# Altium PCB Test (2).PcbDoc (part 3 of 4)
Units mm, origin at the board's own origin, x right, y up, seen from the top; angles counter-clockwise.
Board outline 152.4 x 101.6 mm, 2 copper layers (Top Layer, Bottom Layer); 1 components, 0 nets, 300 pads, 1 vias.
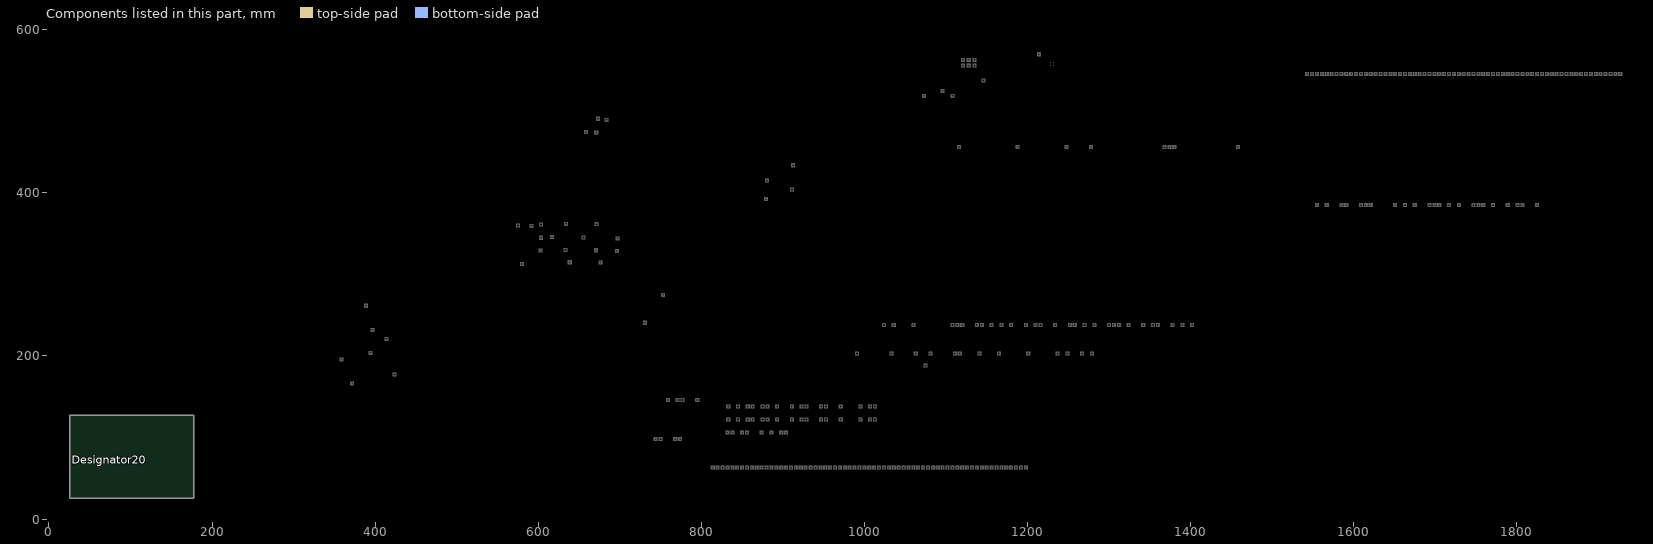
[diagram p3: the components of this part, seen from the top]

## Via types
v1: diameter 0.9, hole 0.4, Top Layer to Bottom Layer, 1 vias

## Nets (pads, with @x,y where several pads share a name; then routed paths per layer and width w, separated by ;. In a path a pad name is that pad's centre, name@x,y a point inside that pad or via, vN(x,y) a via of type N, cw(c..) or ccw(c..) an arc to the next point about the centre after c; other vN are vias at no path point) (continued)
copper on no net: (continued)
  Top Layer w0.2: 1010,188 ccw(c1009,188) 1010,188 ; 1010,188 ccw(c1009,188) 1010,188 ; 1013,188 1015,188 ; 1013,188 1015,188 ; 1013,188 1015,188 ; 1015,186 1015,188 ; 1015,186 1015,188 ; 1015,186 1015,188 ; 1015,188 1017,188 ; 1015,188 1015,190 ; 1015,188 1017,188 ; 1015,188 1015,190 ; 1015,188 1017,188 ; 1015,188 1015,190 ; 1016,188 ccw(c1015,188) 1016,188 ; 1016,188 ccw(c1015,188) 1016,188 ; 1016,188 ccw(c1015,188) 1016,188 ; 1019,188 1021,188 ; 1019,188 1021,188 ; 1019,188 1021,188 ; 1021,186 1021,188 ; 1021,186 1021,188 ; 1021,186 1021,188 ; 1021,188 1023,188 ; 1021,188 1021,190 ; 1021,188 1023,188 ; 1021,188 1021,190 ; 1021,188 1023,188 ; 1021,188 1021,190 ; 1022,188 ccw(c1021,188) 1022,188 ; 1022,188 ccw(c1021,188) 1022,188 ; 1022,188 ccw(c1021,188) 1022,188 ; 1022,238 1024,238 ; 1022,238 1024,238 ; 1022,238 1024,238 ; 1022,238 1024,238 ; 1024,236 1024,238 ; 1024,236 1024,238 ; 1024,236 1024,238 ; 1024,236 1024,238 ; 1024,238 1026,238 ; 1024,238 1024,240 ; 1024,238 1026,238 ; 1024,238 1024,240 ; 1024,238 1026,238 ; 1024,238 1024,240 ; 1024,238 1026,238 ; 1024,238 1024,240 ; 1025,188 1027,188 ; 1025,188 1027,188 ; 1025,188 1027,188 ; 1025,238 ccw(c1024,238) 1025,238 ; 1025,238 ccw(c1024,238) 1025,238 ; 1025,238 ccw(c1024,238) 1025,238 ; 1025,238 ccw(c1024,238) 1025,238 ; 1027,186 1027,188 ; 1027,186 1027,188 ; 1027,186 1027,188 ; 1027,188 1029,188 ; 1027,188 1027,190 ; 1027,188 1029,188 ; 1027,188 1027,190 ; 1027,188 1029,188 ; 1027,188 1027,190 ; 1028,188 ccw(c1027,188) 1028,188 ; 1028,188 ccw(c1027,188) 1028,188 ; 1028,188 ccw(c1027,188) 1028,188 ; 1031,188 1033,188 ; 1031,188 1033,188 ; 1031,188 1033,188 ; 1033,186 1033,188 ; 1033,186 1033,188 ; 1033,186 1033,188 ; 1033,188 1035,188 ; 1033,188 1033,190 ; 1033,188 1035,188 ; 1033,188 1033,190 ; 1033,188 1035,188 ; 1033,188 1033,190 ; 1034,188 ccw(c1033,188) 1034,188 ; 1034,188 ccw(c1033,188) 1034,188 ; 1034,188 ccw(c1033,188) 1034,188 ; 1034,238 1036,238 ; 1034,238 1036,238 ; 1034,238 1036,238 ; 1034,238 1036,238 ; 1036,236 1036,238 ; 1036,236 1036,238 ; 1036,236 1036,238 ; 1036,236 1036,238 ; 1036,238 1038,238 ; 1036,238 1036,240 ; 1036,238 1038,238 ; 1036,238 1036,240 ; 1036,238 1038,238 ; 1036,238 1036,240 ; 1036,238 1038,238 ; 1036,238 1036,240 ; 1037,188 1039,188 ; 1037,188 1039,188 ; 1037,188 1039,188 ; 1037,238 ccw(c1036,238) 1037,238 ; 1037,238 ccw(c1036,238) 1037,238 ; 1037,238 ccw(c1036,238) 1037,238 ; 1037,238 ccw(c1036,238) 1037,238 ; 1039,186 1039,188 ; 1039,186 1039,188 ; 1039,186 1039,188 ; 1039,188 1041,188 ; 1039,188 1039,190 ; 1039,188 1041,188 ; 1039,188 1039,190 ; 1039,188 1041,188 ; 1039,188 1039,190 ; 1040,188 ccw(c1039,188) 1040,188 ; 1040,188 ccw(c1039,188) 1040,188 ; 1040,188 ccw(c1039,188) 1040,188 ; 1043,188 1045,188 ; 1043,188 1045,188 ; 1043,188 1045,188 ; 1045,186 1045,188 ; 1045,186 1045,188 ; 1045,186 1045,188 ; 1045,188 1047,188 ; 1045,188 1045,190 ; 1045,188 1047,188 ; 1045,188 1045,190 ; 1045,188 1047,188 ; 1045,188 1045,190 ; 1046,188 ccw(c1045,188) 1046,188 ; 1046,188 ccw(c1045,188) 1046,188 ; 1046,188 ccw(c1045,188) 1046,188 ; 1049,188 1051,188 ; 1049,188 1051,188 ; 1049,188 1051,188 ; 1051,186 1051,188 ; 1051,186 1051,188 ; 1051,186 1051,188 ; 1051,188 1053,188 ; 1051,188 1051,190 ; 1051,188 1053,188 ; 1051,188 1051,190 ; 1051,188 1053,188 ; 1051,188 1051,190 ; 1052,188 ccw(c1051,188) 1052,188 ; 1052,188 ccw(c1051,188) 1052,188 ; 1052,188 ccw(c1051,188) 1052,188 ; 1055,188 1057,188 ; 1055,188 1057,188 ; 1055,188 1057,188 ; 1057,186 1057,188 ; 1057,186 1057,188 ; 1057,186 1057,188 ; 1057,188 1059,188 ; 1057,188 1057,190 ; 1057,188 1059,188 ; 1057,188 1057,190 ; 1057,188 1059,188 ; 1057,188 1057,190 ; 1058,188 ccw(c1057,188) 1058,188 ; 1058,188 ccw(c1057,188) 1058,188 ; 1058,188 ccw(c1057,188) 1058,188 ; 1058,238 1060,238 ; 1058,238 1060,238 ; 1058,238 1060,238 ; 1058,238 1060,238 ; 1060,236 1060,238 ; 1060,236 1060,238 ; 1060,236 1060,238 ; 1060,236 1060,238 ; 1060,238 1062,238 ; 1060,238 1060,240 ; 1060,238 1062,238 ; 1060,238 1060,240 ; 1060,238 1062,238 ; 1060,238 1060,240 ; 1060,238 1062,238 ; 1060,238 1060,240 ; 1061,188 1063,188 ; 1061,188 1063,188 ; 1061,188 1063,188 ; 1061,238 ccw(c1060,238) 1061,238 ; 1061,238 ccw(c1060,238) 1061,238 ; 1061,238 ccw(c1060,238) 1061,238 ; 1061,238 ccw(c1060,238) 1061,238 ; 1063,186 1063,188 ; 1063,186 1063,188 ; 1063,186 1063,188 ; 1063,188 1065,188 ; 1063,188 1063,190 ; 1063,188 1065,188 ; 1063,188 1063,190 ; 1063,188 1065,188 ; 1063,188 1063,190 ; 1064,188 ccw(c1063,188) 1064,188 ; 1064,188 ccw(c1063,188) 1064,188 ; 1064,188 ccw(c1063,188) 1064,188 ; 1067,188 1069,188 ; 1067,188 1069,188 ; 1067,188 1069,188 ; 1069,186 1069,188 ; 1069,186 1069,188 ; 1069,186 1069,188 ; 1069,188 1071,188 ; 1069,188 1069,190 ; 1069,188 1071,188 ; 1069,188 1069,190 ; 1069,188 1071,188 ; 1069,188 1069,190 ; 1070,188 ccw(c1069,188) 1070,188 ; 1070,188 ccw(c1069,188) 1070,188 ; 1070,188 ccw(c1069,188) 1070,188 ; 1070,238 1072,238 ; 1070,238 1072,238 ; 1070,238 1072,238 ; 1070,238 1072,238 ; 1070,238 1072,238 ; 1072,236 1072,238 ; 1072,236 1072,238 ; 1072,236 1072,238 ; 1072,236 1072,238 ; 1072,236 1072,238 ; 1072,238 1074,238 ; 1072,238 1072,240 ; 1072,238 1074,238 ; 1072,238 1072,240 ; 1072,238 1074,238 ; 1072,238 1072,240 ; 1072,238 1074,238 ; 1072,238 1072,240 ; 1072,238 1074,238 ; 1072,238 1072,240 ; 1073,238 ccw(c1072,238) 1073,238 ; 1073,238 ccw(c1072,238) 1073,238 ; 1073,238 ccw(c1072,238) 1073,238 ; 1073,238 ccw(c1072,238) 1073,238 ; 1073,238 ccw(c1072,238) 1073,238 ; 1075,188 1073,188 1075,188 ; 1075,188 1077,188 1075,188 ; 1075,188 1075,186 1075,188 ; 1075,188 1075,190 1075,188 ; 1076,188 ccw(c1075,188) 1076,188 ; 1076,188 ccw(c1075,188) 1076,188 ; 1076,238 1078,238 ; 1076,238 1078,238 ; 1076,238 1078,238 ; 1076,238 1078,238 ; 1076,238 1078,238 ; 1078,236 1078,238 ; 1078,236 1078,238 ; 1078,236 1078,238 ; 1078,236 1078,238 ; 1078,236 1078,238 ; 1078,238 1080,238 ; 1078,238 1078,240 ; 1078,238 1080,238 ; 1078,238 1078,240 ; 1078,238 1080,238 ; 1078,238 1078,240 ; 1078,238 1080,238 ; 1078,238 1078,240 ; 1078,238 1080,238 ; 1078,238 1078,240 ; 1079,188 1081,188 ; 1079,188 1081,188 ; 1079,188 1081,188 ; 1079,238 ccw(c1078,238) 1079,238 ; 1079,238 ccw(c1078,238) 1079,238 ; 1079,238 ccw(c1078,238) 1079,238 ; 1079,238 ccw(c1078,238) 1079,238 ; 1079,238 ccw(c1078,238) 1079,238 ; 1081,186 1081,188 ; 1081,186 1081,188 ; 1081,186 1081,188 ; 1081,188 1083,188 ; 1081,188 1081,190 ; 1081,188 1083,188 ; 1081,188 1081,190 ; 1081,188 1083,188 ; 1081,188 1081,190 ; 1082,188 ccw(c1081,188) 1082,188 ; 1082,188 ccw(c1081,188) 1082,188 ; 1082,188 ccw(c1081,188) 1082,188 ; 1082,238 1084,238 ; 1082,238 1084,238 ; 1082,238 1084,238 ; 1082,238 1084,238 ; 1082,238 1084,238 ; 1084,236 1084,238 ; 1084,236 1084,238 ; 1084,236 1084,238 ; 1084,236 1084,238 ; 1084,236 1084,238 ; 1084,238 1086,238 ; 1084,238 1084,240 ; 1084,238 1086,238 ; 1084,238 1084,240 ; 1084,238 1086,238 ; 1084,238 1084,240 ; 1084,238 1086,238 ; 1084,238 1084,240 ; 1084,238 1086,238 ; 1084,238 1084,240 ; 1085,188 1087,188 ; 1085,188 1087,188 ; 1085,188 1087,188 ; 1085,238 ccw(c1084,238) 1085,238 ; 1085,238 ccw(c1084,238) 1085,238 ; 1085,238 ccw(c1084,238) 1085,238 ; 1085,238 ccw(c1084,238) 1085,238 ; 1085,238 ccw(c1084,238) 1085,238 ; 1087,186 1087,188 ; 1087,186 1087,188 ; 1087,186 1087,188 ; 1087,188 1089,188 ; 1087,188 1087,190 ; 1087,188 1089,188 ; 1087,188 1087,190 ; 1087,188 1089,188 ; 1087,188 1087,190 ; 1088,188 ccw(c1087,188) 1088,188 ; 1088,188 ccw(c1087,188) 1088,188 ; 1088,188 ccw(c1087,188) 1088,188 ; 1091,188 1093,188 ; 1091,188 1093,188 ; 1091,188 1093,188 ; 1093,186 1093,188 ; 1093,186 1093,188 ; 1093,186 1093,188 ; 1093,188 1095,188 ; 1093,188 1093,190 ; 1093,188 1095,188 ; 1093,188 1093,190 ; 1093,188 1095,188 ; 1093,188 1093,190 ; 1094,188 ccw(c1093,188) 1094,188 ; 1094,188 ccw(c1093,188) 1094,188 ; 1094,188 ccw(c1093,188) 1094,188 ; 1097,188 1099,188 ; 1097,188 1099,188 ; 1097,188 1099,188 ; 1099,186 1099,188 ; 1099,186 1099,188 ; 1099,186 1099,188 ; 1099,188 1101,188 ; 1099,188 1099,190 ; 1099,188 1101,188 ; 1099,188 1099,190 ; 1099,188 1101,188 ; 1099,188 1099,190 ; 1100,188 ccw(c1099,188) 1100,188 ; 1100,188 ccw(c1099,188) 1100,188 ; 1100,188 ccw(c1099,188) 1100,188 ; 1103,188 1105,188 ; 1103,188 1105,188 ; 1103,188 1105,188 ; 1105,186 1105,188 ; 1105,186 1105,188 ; 1105,186 1105,188 ; 1105,188 1107,188 ; 1105,188 1105,190 ; 1105,188 1107,188 ; 1105,188 1105,190 ; 1105,188 1107,188 ; 1105,188 1105,190 ; 1106,188 ccw(c1105,188) 1106,188 ; 1106,188 ccw(c1105,188) 1106,188 ; 1106,188 ccw(c1105,188) 1106,188 ; 1106,238 1108,238 ; 1106,238 1108,238 ; 1106,238 1108,238 ; 1106,238 1108,238 ; 1108,236 1108,238 ; 1108,236 1108,238 ; 1108,236 1108,238 ; 1108,236 1108,238 ; 1108,238 1110,238 ; 1108,238 1108,240 ; 1108,238 1110,238 ; 1108,238 1108,240 ; 1108,238 1110,238 ; 1108,238 1108,240 ; 1108,238 1110,238 ; 1108,238 1108,240 ; 1109,188 1111,188 ; 1109,188 1111,188 ; 1109,188 1111,188 ; 1109,238 ccw(c1108,238) 1109,238 ; 1109,238 ccw(c1108,238) 1109,238 ; 1109,238 ccw(c1108,238) 1109,238 ; 1109,238 ccw(c1108,238) 1109,238 ; 1111,186 1111,188 ; 1111,186 1111,188 ; 1111,186 1111,188 ; 1111,188 1113,188 ; 1111,188 1111,190 ; 1111,188 1113,188 ; 1111,188 1111,190 ; 1111,188 1113,188 ; 1111,188 1111,190 ; 1112,188 ccw(c1111,188) 1112,188 ; 1112,188 ccw(c1111,188) 1112,188 ; 1112,188 ccw(c1111,188) 1112,188 ; 1112,238 1114,238 ; 1112,238 1114,238 ; 1112,238 1114,238 ; 1112,238 1114,238 ; 1114,236 1114,238 ; 1114,236 1114,238 ; 1114,236 1114,238 ; 1114,236 1114,238 ; 1114,238 1116,238 ; 1114,238 1114,240 ; 1114,238 1116,238 ; 1114,238 1114,240 ; 1114,238 1116,238 ; 1114,238 1114,240 ; 1114,238 1116,238 ; 1114,238 1114,240 ; 1115,188 1117,188 ; 1115,188 1117,188 ; 1115,188 1117,188 ; 1115,238 ccw(c1114,238) 1115,238 ; 1115,238 ccw(c1114,238) 1115,238 ; 1115,238 ccw(c1114,238) 1115,238 ; 1115,238 ccw(c1114,238) 1115,238 ; 1117,186 1117,188 ; 1117,186 1117,188 ; 1117,186 1117,188 ; 1117,188 1119,188 ; 1117,188 1117,190 ; 1117,188 1119,188 ; 1117,188 1117,190 ; 1117,188 1119,188 ; 1117,188 1117,190 ; 1118,188 ccw(c1117,188) 1118,188 ; 1118,188 ccw(c1117,188) 1118,188 ; 1118,188 ccw(c1117,188) 1118,188 ; 1118,238 1120,238 ; 1118,238 1120,238 ; 1118,238 1120,238 ; 1118,238 1120,238 ; 1120,236 1120,238 ; 1120,236 1120,238 ; 1120,236 1120,238 ; 1120,236 1120,238 ; 1120,238 1122,238 ; 1120,238 1120,240 ; 1120,238 1122,238 ; 1120,238 1120,240 ; 1120,238 1122,238 ; 1120,238 1120,240 ; 1120,238 1122,238 ; 1120,238 1120,240 ; 1121,188 1123,188 ; 1121,188 1123,188 ; 1121,188 1123,188 ; 1121,238 ccw(c1120,238) 1121,238 ; 1121,238 ccw(c1120,238) 1121,238 ; 1121,238 ccw(c1120,238) 1121,238 ; 1121,238 ccw(c1120,238) 1121,238 ; 1123,186 1123,188 ; 1123,186 1123,188 ; 1123,186 1123,188 ; 1123,188 1125,188 ; 1123,188 1123,190 ; 1123,188 1125,188 ; 1123,188 1123,190 ; 1123,188 1125,188 ; 1123,188 1123,190 ; 1124,188 ccw(c1123,188) 1124,188 ; 1124,188 ccw(c1123,188) 1124,188 ; 1124,188 ccw(c1123,188) 1124,188 ; 1127,188 1129,188 ; 1127,188 1129,188 ; 1127,188 1129,188 ; 1129,186 1129,188 ; 1129,186 1129,188 ; 1129,186 1129,188 ; 1129,188 1131,188 ; 1129,188 1129,190 ; 1129,188 1131,188 ; 1129,188 1129,190 ; 1129,188 1131,188 ; 1129,188 1129,190 ; 1130,188 ccw(c1129,188) 1130,188 ; 1130,188 ccw(c1129,188) 1130,188 ; 1130,188 ccw(c1129,188) 1130,188 ; 1133,188 1135,188 ; 1133,188 1135,188 ; 1133,188 1135,188 ; 1135,186 1135,188 ; 1135,186 1135,188 ; 1135,186 1135,188 ; 1135,188 1137,188 ; 1135,188 1135,190 ; 1135,188 1137,188 ; 1135,188 1135,190 ; 1135,188 1137,188 ; 1135,188 1135,190 ; 1136,188 ccw(c1135,188) 1136,188 ; 1136,188 ccw(c1135,188) 1136,188 ; 1136,188 ccw(c1135,188) 1136,188 ; 1136,238 1138,238 ; 1136,238 1138,238 ; 1136,238 1138,238 ; 1136,238 1138,238 ; 1138,236 1138,238 ; 1138,236 1138,238 ; 1138,236 1138,238 ; 1138,236 1138,238 ; 1138,238 1140,238 ; 1138,238 1138,240 ; 1138,238 1140,238 ; 1138,238 1138,240 ; 1138,238 1140,238 ; 1138,238 1138,240 ; 1138,238 1140,238 ; 1138,238 1138,240 ; 1139,188 1141,188 ; 1139,188 1141,188 ; 1139,188 1141,188 ; 1139,238 ccw(c1138,238) 1139,238 ; 1139,238 ccw(c1138,238) 1139,238 ; 1139,238 ccw(c1138,238) 1139,238 ; 1139,238 ccw(c1138,238) 1139,238 ; 1141,186 1141,188 ; 1141,186 1141,188 ; 1141,186 1141,188 ; 1141,188 1143,188 ; 1141,188 1141,190 ; 1141,188 1143,188 ; 1141,188 1141,190 ; 1141,188 1143,188 ; 1141,188 1141,190 ; 1142,188 ccw(c1141,188) 1142,188 ; 1142,188 ccw(c1141,188) 1142,188 ; 1142,188 ccw(c1141,188) 1142,188 ; 1142,238 1144,238 ; 1142,238 1144,238 ; 1142,238 1144,238 ; 1142,238 1144,238 ; 1144,236 1144,238 ; 1144,236 1144,238 ; 1144,236 1144,238 ; 1144,236 1144,238 ; 1144,238 1146,238 ; 1144,238 1144,240 ; 1144,238 1146,238 ; 1144,238 1144,240 ; 1144,238 1146,238 ; 1144,238 1144,240 ; 1144,238 1146,238 ; 1144,238 1144,240 ; 1145,188 1147,188 ; 1145,188 1147,188 ; 1145,188 1147,188 ; 1145,238 ccw(c1144,238) 1145,238 ; 1145,238 ccw(c1144,238) 1145,238 ; 1145,238 ccw(c1144,238) 1145,238 ; 1145,238 ccw(c1144,238) 1145,238 ; 1147,186 1147,188 ; 1147,186 1147,188 ; 1147,186 1147,188 ; 1147,188 1149,188 ; 1147,188 1147,190 ; 1147,188 1149,188 ; 1147,188 1147,190 ; 1147,188 1149,188 ; 1147,188 1147,190 ; 1148,188 ccw(c1147,188) 1148,188 ; 1148,188 ccw(c1147,188) 1148,188 ; 1148,188 ccw(c1147,188) 1148,188 ; 1151,188 1153,188 ; 1151,188 1153,188 ; 1151,188 1153,188 ; 1153,186 1153,188 ; 1153,186 1153,188 ; 1153,186 1153,188 ; 1153,188 1155,188 ; 1153,188 1153,190 ; 1153,188 1155,188 ; 1153,188 1153,190 ; 1153,188 1155,188 ; 1153,188 1153,190 ; 1154,188 ccw(c1153,188) 1154,188 ; 1154,188 ccw(c1153,188) 1154,188 ; 1154,188 ccw(c1153,188) 1154,188 ; 1154,238 1156,238 ; 1154,238 1156,238 ; 1154,238 1156,238 ; 1154,238 1156,238 ; 1156,236 1156,238 ; 1156,236 1156,238 ; 1156,236 1156,238 ; 1156,236 1156,238 ; 1156,238 1158,238 ; 1156,238 1156,240 ; 1156,238 1158,238 ; 1156,238 1156,240 ; 1156,238 1158,238 ; 1156,238 1156,240 ; 1156,238 1158,238 ; 1156,238 1156,240 ; 1157,188 1159,188 ; 1157,188 1159,188 ; 1157,188 1159,188 ; 1157,238 ccw(c1156,238) 1157,238 ; 1157,238 ccw(c1156,238) 1157,238 ; 1157,238 ccw(c1156,238) 1157,238 ; 1157,238 ccw(c1156,238) 1157,238 ; 1159,186 1159,188 ; 1159,186 1159,188 ; 1159,186 1159,188 ; 1159,188 1161,188 ; 1159,188 1159,190 ; 1159,188 1161,188 ; 1159,188 1159,190 ; 1159,188 1161,188 ; 1159,188 1159,190 ; 1160,188 ccw(c1159,188) 1160,188 ; 1160,188 ccw(c1159,188) 1160,188 ; 1160,188 ccw(c1159,188) 1160,188 ; 1163,188 1165,188 ; 1163,188 1165,188 ; 1163,188 1165,188 ; 1165,186 1165,188 ; 1165,186 1165,188 ; 1165,186 1165,188 ; 1165,188 1167,188 ; 1165,188 1165,190 ; 1165,188 1167,188 ; 1165,188 1165,190 ; 1165,188 1167,188 ; 1165,188 1165,190 ; 1166,188 ccw(c1165,188) 1166,188 ; 1166,188 ccw(c1165,188) 1166,188 ; 1166,188 ccw(c1165,188) 1166,188 ; 1166,238 1168,238 ; 1166,238 1168,238 ; 1166,238 1168,238 ; 1166,238 1168,238 ; 1168,236 1168,238 ; 1168,236 1168,238 ; 1168,236 1168,238 ; 1168,236 1168,238 ; 1168,238 1170,238 ; 1168,238 1168,240 ; 1168,238 1170,238 ; 1168,238 1168,240 ; 1168,238 1170,238 ; 1168,238 1168,240 ; 1168,238 1170,238 ; 1168,238 1168,240 ; 1169,188 1171,188 ; 1169,188 1171,188 ; 1169,188 1171,188 ; 1169,238 ccw(c1168,238) 1169,238 ; 1169,238 ccw(c1168,238) 1169,238 ; 1169,238 ccw(c1168,238) 1169,238 ; 1169,238 ccw(c1168,238) 1169,238 ; 1171,186 1171,188 ; 1171,186 1171,188 ; 1171,186 1171,188 ; 1171,188 1173,188 ; 1171,188 1171,190 ; 1171,188 1173,188 ; 1171,188 1171,190 ; 1171,188 1173,188 ; 1171,188 1171,190 ; 1172,188 ccw(c1171,188) 1172,188 ; 1172,188 ccw(c1171,188) 1172,188 ; 1172,188 ccw(c1171,188) 1172,188 ; 1175,188 1177,188 ; 1175,188 1177,188 ; 1175,188 1177,188 ; 1177,186 1177,188 ; 1177,186 1177,188 ; 1177,186 1177,188 ; 1177,188 1179,188 ; 1177,188 1177,190 ; 1177,188 1179,188 ; 1177,188 1177,190 ; 1177,188 1179,188 ; 1177,188 1177,190 ; 1178,188 ccw(c1177,188) 1178,188 ; 1178,188 ccw(c1177,188) 1178,188 ; 1178,188 ccw(c1177,188) 1178,188 ; 1178,238 1180,238 ; 1178,238 1180,238 ; 1178,238 1180,238 ; 1178,238 1180,238 ; 1180,236 1180,238 ; 1180,236 1180,238 ; 1180,236 1180,238 ; 1180,236 1180,238 ; 1180,238 1182,238 ; 1180,238 1180,240 ; 1180,238 1182,238 ; 1180,238 1180,240 ; 1180,238 1182,238 ; 1180,238 1180,240 ; 1180,238 1182,238 ; 1180,238 1180,240 ; 1181,188 1183,188 ; 1181,188 1183,188 ; 1181,188 1183,188 ; 1181,238 ccw(c1180,238) 1181,238 ; 1181,238 ccw(c1180,238) 1181,238 ; 1181,238 ccw(c1180,238) 1181,238 ; 1181,238 ccw(c1180,238) 1181,238 ; 1183,186 1183,188 ; 1183,186 1183,188 ; 1183,186 1183,188 ; 1183,188 1185,188 ; 1183,188 1183,190 ; 1183,188 1185,188 ; 1183,188 1183,190 ; 1183,188 1185,188 ; 1183,188 1183,190 ; 1184,188 ccw(c1183,188) 1184,188 ; 1184,188 ccw(c1183,188) 1184,188 ; 1184,188 ccw(c1183,188) 1184,188 ; 1187,188 1189,188 ; 1187,188 1189,188 ; 1187,188 1189,188 ; 1189,186 1189,188 ; 1189,186 1189,188 ; 1189,186 1189,188 ; 1189,188 1191,188 ; 1189,188 1189,190 ; 1189,188 1191,188 ; 1189,188 1189,190 ; 1189,188 1191,188 ; 1189,188 1189,190 ; 1190,188 ccw(c1189,188) 1190,188 ; 1190,188 ccw(c1189,188) 1190,188 ; 1190,188 ccw(c1189,188) 1190,188 ; 1193,188 1195,188 ; 1193,188 1195,188 ; 1193,188 1195,188 ; 1195,186 1195,188 ; 1195,186 1195,188 ; 1195,186 1195,188 ; 1195,188 1197,188 ; 1195,188 1195,190 ; 1195,188 1197,188 ; 1195,188 1195,190 ; 1195,188 1197,188 ; 1195,188 1195,190 ; 1196,188 ccw(c1195,188) 1196,188 ; 1196,188 ccw(c1195,188) 1196,188 ; 1196,188 ccw(c1195,188) 1196,188 ; 1196,238 1198,238 ; 1196,238 1198,238 ; 1196,238 1198,238 ; 1196,238 1198,238 ; 1198,236 1198,238 ; 1198,236 1198,238 ; 1198,236 1198,238 ; 1198,236 1198,238 ; 1198,238 1200,238 ; 1198,238 1198,240 ; 1198,238 1200,238 ; 1198,238 1198,240 ; 1198,238 1200,238 ; 1198,238 1198,240 ; 1198,238 1200,238 ; 1198,238 1198,240 ; 1199,188 1201,188 ; 1199,188 1201,188 ; 1199,188 1201,188 ; 1199,238 ccw(c1198,238) 1199,238 ; 1199,238 ccw(c1198,238) 1199,238 ; 1199,238 ccw(c1198,238) 1199,238 ; 1199,238 ccw(c1198,238) 1199,238 ; 1201,186 1201,188 ; 1201,186 1201,188 ; 1201,186 1201,188 ; 1201,188 1203,188 ; 1201,188 1201,190 ; 1201,188 1203,188 ; 1201,188 1201,190 ; 1201,188 1203,188 ; 1201,188 1201,190 ; 1202,188 ccw(c1201,188) 1202,188 ; 1202,188 ccw(c1201,188) 1202,188 ; 1202,188 ccw(c1201,188) 1202,188 ; 1205,188 1207,188 ; 1205,188 1207,188 ; 1205,188 1207,188 ; 1207,186 1207,188 ; 1207,186 1207,188 ; 1207,186 1207,188 ; 1207,188 1209,188 ; 1207,188 1207,190 ; 1207,188 1209,188 ; 1207,188 1207,190 ; 1207,188 1209,188 ; 1207,188 1207,190 ; 1208,188 ccw(c1207,188) 1208,188 ; 1208,188 ccw(c1207,188) 1208,188 ; 1208,188 ccw(c1207,188) 1208,188 ; 1208,238 1210,238 ; 1208,238 1210,238 ; 1208,238 1210,238 ; 1208,238 1210,238 ; 1210,236 1210,238 ; 1210,236 1210,238 ; 1210,236 1210,238 ; 1210,236 1210,238 ; 1210,238 1212,238 ; 1210,238 1210,240 ; 1210,238 1212,238 ; 1210,238 1210,240 ; 1210,238 1212,238 ; 1210,238 1210,240 ; 1210,238 1212,238 ; 1210,238 1210,240 ; 1211,188 1213,188 ; 1211,188 1213,188 ; 1211,188 1213,188 ; 1211,238 ccw(c1210,238) 1211,238 ; 1211,238 ccw(c1210,238) 1211,238 ; 1211,238 ccw(c1210,238) 1211,238 ; 1211,238 ccw(c1210,238) 1211,238 ; 1213,186 1213,188 ; 1213,186 1213,188 ; 1213,186 1213,188 ; 1213,188 1215,188 ; 1213,188 1213,190 ; 1213,188 1215,188 ; 1213,188 1213,190 ; 1213,188 1215,188 ; 1213,188 1213,190 ; 1214,188 ccw(c1213,188) 1214,188 ; 1214,188 ccw(c1213,188) 1214,188 ; 1214,188 ccw(c1213,188) 1214,188 ; 1214,238 1216,238 ; 1214,238 1216,238 ; 1214,238 1216,238 ; 1214,238 1216,238 ; 1216,236 1216,238 ; 1216,236 1216,238 ; 1216,236 1216,238 ; 1216,236 1216,238 ; 1216,238 1218,238 ; 1216,238 1216,240 ; 1216,238 1218,238 ; 1216,238 1216,240 ; 1216,238 1218,238 ; 1216,238 1216,240 ; 1216,238 1218,238 ; 1216,238 1216,240 ; 1217,188 1219,188 ; 1217,188 1219,188 ; 1217,188 1219,188 ; 1217,238 ccw(c1216,238) 1217,238 ; 1217,238 ccw(c1216,238) 1217,238 ; 1217,238 ccw(c1216,238) 1217,238 ; 1217,238 ccw(c1216,238) 1217,238 ; 1219,186 1219,188 ; 1219,186 1219,188 ; 1219,186 1219,188 ; 1219,188 1221,188 ; 1219,188 1219,190 ; 1219,188 1221,188 ; 1219,188 1219,190 ; 1219,188 1221,188 ; 1219,188 1219,190 ; 1220,188 ccw(c1219,188) 1220,188 ; 1220,188 ccw(c1219,188) 1220,188 ; 1220,188 ccw(c1219,188) 1220,188 ; 1223,188 1225,188 ; 1223,188 1225,188 ; 1223,188 1225,188 ; 1225,186 1225,188 ; 1225,186 1225,188 ; 1225,186 1225,188 ; 1225,188 1227,188 ; 1225,188 1225,190 ; 1225,188 1227,188 ; 1225,188 1225,190 ; 1225,188 1227,188 ; 1225,188 1225,190 ; 1226,188 ccw(c1225,188) 1226,188 ; 1226,188 ccw(c1225,188) 1226,188 ; 1226,188 ccw(c1225,188) 1226,188 ; 1229,188 1231,188 ; 1229,188 1231,188 ; 1229,188 1231,188 ; 1231,186 1231,188 ; 1231,186 1231,188 ; 1231,186 1231,188 ; 1231,188 1233,188 ; 1231,188 1231,190 ; 1231,188 1233,188 ; 1231,188 1231,190 ; 1231,188 1233,188 ; 1231,188 1231,190 ; 1232,188 ccw(c1231,188) 1232,188 ; 1232,188 ccw(c1231,188) 1232,188 ; 1232,188 ccw(c1231,188) 1232,188 ; 1232,238 1234,238 ; 1232,238 1234,238 ; 1232,238 1234,238 ; 1232,238 1234,238 ; 1234,236 1234,238 ; 1234,236 1234,238 ; 1234,236 1234,238 ; 1234,236 1234,238 ; 1234,238 1236,238 ; 1234,238 1234,240 ; 1234,238 1236,238 ; 1234,238 1234,240 ; 1234,238 1236,238 ; 1234,238 1234,240 ; 1234,238 1236,238 ; 1234,238 1234,240 ; 1235,188 1237,188 ; 1235,188 1237,188 ; 1235,188 1237,188 ; 1235,238 ccw(c1234,238) 1235,238 ; 1235,238 ccw(c1234,238) 1235,238 ; 1235,238 ccw(c1234,238) 1235,238 ; 1235,238 ccw(c1234,238) 1235,238 ; 1237,186 1237,188 ; 1237,186 1237,188 ; 1237,186 1237,188 ; 1237,188 1239,188 ; 1237,188 1237,190 ; 1237,188 1239,188 ; 1237,188 1237,190 ; 1237,188 1239,188 ; 1237,188 1237,190 ; 1238,188 ccw(c1237,188) 1238,188 ; 1238,188 ccw(c1237,188) 1238,188 ; 1238,188 ccw(c1237,188) 1238,188 ; 1241,188 1243,188 ; 1241,188 1243,188 ; 1241,188 1243,188 ; 1243,186 1243,188 ; 1243,186 1243,188 ; 1243,186 1243,188 ; 1243,188 1245,188 ; 1243,188 1243,190 ; 1243,188 1245,188 ; 1243,188 1243,190 ; 1243,188 1245,188 ; 1243,188 1243,190 ; 1244,188 ccw(c1243,188) 1244,188 ; 1244,188 ccw(c1243,188) 1244,188 ; 1244,188 ccw(c1243,188) 1244,188 ; 1247,188 1249,188 ; 1247,188 1249,188 ; 1247,188 1249,188 ; 1249,186 1249,188 ; 1249,186 1249,188 ; 1249,186 1249,188 ; 1249,188 1251,188 ; 1249,188 1249,190 ; 1249,188 1251,188 ; 1249,188 1249,190 ; 1249,188 1251,188 ; 1249,188 1249,190 ; 1250,188 ccw(c1249,188) 1250,188 ; 1250,188 ccw(c1249,188) 1250,188 ; 1250,188 ccw(c1249,188) 1250,188 ; 1250,238 1252,238 ; 1250,238 1252,238 ; 1250,238 1252,238 ; 1250,238 1252,238 ; 1252,236 1252,238 ; 1252,236 1252,238 ; 1252,236 1252,238 ; 1252,236 1252,238 ; 1252,238 1254,238 ; 1252,238 1252,240 ; 1252,238 1254,238 ; 1252,238 1252,240 ; 1252,238 1254,238 ; 1252,238 1252,240 ; 1252,238 1254,238 ; 1252,238 1252,240 ; 1253,188 1255,188 ; 1253,188 1255,188 ; 1253,188 1255,188 ; 1253,238 ccw(c1252,238) 1253,238 ; 1253,238 ccw(c1252,238) 1253,238 ; 1253,238 ccw(c1252,238) 1253,238 ; 1253,238 ccw(c1252,238) 1253,238 ; 1255,186 1255,188 ; 1255,186 1255,188 ; 1255,186 1255,188 ; 1255,188 1257,188 ; 1255,188 1255,190 ; 1255,188 1257,188 ; 1255,188 1255,190 ; 1255,188 1257,188 ; 1255,188 1255,190 ; 1256,188 ccw(c1255,188) 1256,188 ; 1256,188 ccw(c1255,188) 1256,188 ; 1256,188 ccw(c1255,188) 1256,188 ; 1256,238 1258,238 ; 1256,238 1258,238 ; 1256,238 1258,238 ; 1256,238 1258,238 ; 1258,236 1258,238 ; 1258,236 1258,238 ; 1258,236 1258,238 ; 1258,236 1258,238 ; 1258,238 1260,238 ; 1258,238 1258,240 ; 1258,238 1260,238 ; 1258,238 1258,240 ; 1258,238 1260,238 ; 1258,238 1258,240 ; 1258,238 1260,238 ; 1258,238 1258,240 ; 1259,188 1261,188 ; 1259,188 1261,188 ; 1259,188 1261,188 ; 1259,238 ccw(c1258,238) 1259,238 ; 1259,238 ccw(c1258,238) 1259,238 ; 1259,238 ccw(c1258,238) 1259,238 ; 1259,238 ccw(c1258,238) 1259,238 ; 1261,186 1261,188 ; 1261,186 1261,188 ; 1261,186 1261,188 ; 1261,188 1263,188 ; 1261,188 1261,190 ; 1261,188 1263,188 ; 1261,188 1261,190 ; 1261,188 1263,188 ; 1261,188 1261,190 ; 1262,188 ccw(c1261,188) 1262,188 ; 1262,188 ccw(c1261,188) 1262,188 ; 1262,188 ccw(c1261,188) 1262,188 ; 1265,188 1267,188 ; 1265,188 1267,188 ; 1265,188 1267,188 ; 1267,186 1267,188 ; 1267,186 1267,188 ; 1267,186 1267,188 ; 1267,188 1269,188 ; 1267,188 1267,190 ; 1267,188 1269,188 ; 1267,188 1267,190 ; 1267,188 1269,188 ; 1267,188 1267,190 ; 1268,188 ccw(c1267,188) 1268,188 ; 1268,188 ccw(c1267,188) 1268,188 ; 1268,188 ccw(c1267,188) 1268,188 ; 1268,238 1270,238 ; 1268,238 1270,238 ; 1268,238 1270,238 ; 1268,238 1270,238 ; 1270,236 1270,238 ; 1270,236 1270,238 ; 1270,236 1270,238 ; 1270,236 1270,238 ; 1270,238 1272,238 ; 1270,238 1270,240 ; 1270,238 1272,238 ; 1270,238 1270,240 ; 1270,238 1272,238 ; 1270,238 1270,240 ; 1270,238 1272,238 ; 1270,238 1270,240 ; 1271,188 1273,188 ; 1271,188 1273,188 ; 1271,188 1273,188 ; 1271,238 ccw(c1270,238) 1271,238 ; 1271,238 ccw(c1270,238) 1271,238 ; 1271,238 ccw(c1270,238) 1271,238 ; 1271,238 ccw(c1270,238) 1271,238 ; 1273,186 1273,188 ; 1273,186 1273,188 ; 1273,186 1273,188 ; 1273,188 1275,188 ; 1273,188 1273,190 ; 1273,188 1275,188 ; 1273,188 1273,190 ; 1273,188 1275,188 ; 1273,188 1273,190 ; 1274,188 ccw(c1273,188) 1274,188 ; 1274,188 ccw(c1273,188) 1274,188 ; 1274,188 ccw(c1273,188) 1274,188 ; 1277,188 1279,188 ; 1277,188 1279,188 ; 1277,188 1279,188 ; 1279,186 1279,188 ; 1279,186 1279,188 ; 1279,186 1279,188 ; 1279,188 1281,188 ; 1279,188 1279,190 ; 1279,188 1281,188 ; 1279,188 1279,190 ; 1279,188 1281,188 ; 1279,188 1279,190 ; 1280,188 ccw(c1279,188) 1280,188 ; 1280,188 ccw(c1279,188) 1280,188 ; 1280,188 ccw(c1279,188) 1280,188 ; 1280,238 1282,238 ; 1280,238 1282,238 ; 1280,238 1282,238 ; 1280,238 1282,238 ; 1282,236 1282,238 ; 1282,236 1282,238 ; 1282,236 1282,238 ; 1282,236 1282,238 ; 1282,238 1284,238 ; 1282,238 1282,240 ; 1282,238 1284,238 ; 1282,238 1282,240 ; 1282,238 1284,238 ; 1282,238 1282,240 ; 1282,238 1284,238 ; 1282,238 1282,240 ; 1283,188 1285,188 ; 1283,188 1285,188 ; 1283,188 1285,188 ; 1283,238 ccw(c1282,238) 1283,238 ; 1283,238 ccw(c1282,238) 1283,238 ; 1283,238 ccw(c1282,238) 1283,238 ; 1283,238 ccw(c1282,238) 1283,238 ; 1285,186 1285,188 ; 1285,186 1285,188 ; 1285,186 1285,188 ; 1285,188 1287,188 ; 1285,188 1285,190 ; 1285,188 1287,188 ; 1285,188 1285,190 ; 1285,188 1287,188 ; 1285,188 1285,190 ; 1286,188 ccw(c1285,188) 1286,188 ; 1286,188 ccw(c1285,188) 1286,188 ; 1286,188 ccw(c1285,188) 1286,188 ; 1289,188 1291,188 ; 1289,188 1291,188 ; 1289,188 1291,188 ; 1291,186 1291,188 ; 1291,186 1291,188 ; 1291,186 1291,188 ; 1291,188 1293,188 ; 1291,188 1291,190 ; 1291,188 1293,188 ; 1291,188 1291,190 ; 1291,188 1293,188 ; 1291,188 1291,190 ; 1292,188 ccw(c1291,188) 1292,188 ; 1292,188 ccw(c1291,188) 1292,188 ; 1292,188 ccw(c1291,188) 1292,188 ; 1295,188 1297,188 ; 1295,188 1297,188 ; 1295,188 1297,188 ; 1297,186 1297,188 ; 1297,186 1297,188 ; 1297,186 1297,188 ; 1297,188 1299,188 ; 1297,188 1297,190 ; 1297,188 1299,188 ; 1297,188 1297,190 ; 1297,188 1299,188 ; 1297,188 1297,190 ; 1298,188 ccw(c1297,188) 1298,188 ; 1298,188 ccw(c1297,188) 1298,188 ; 1298,188 ccw(c1297,188) 1298,188 ; 1298,238 1300,238 ; 1298,238 1300,238 ; 1298,238 1300,238 ; 1298,238 1300,238 ; 1300,236 1300,238 ; 1300,236 1300,238 ; 1300,236 1300,238 ; 1300,236 1300,238 ; 1300,238 1302,238 ; 1300,238 1300,240 ; 1300,238 1302,238 ; 1300,238 1300,240 ; 1300,238 1302,238 ; 1300,238 1300,240 ; 1300,238 1302,238 ; 1300,238 1300,240 ; 1301,188 1303,188 ; 1301,188 1303,188 ; 1301,188 1303,188 ; 1301,238 ccw(c1300,238) 1301,238 ; 1301,238 ccw(c1300,238) 1301,238 ; 1301,238 ccw(c1300,238) 1301,238 ; 1301,238 ccw(c1300,238) 1301,238 ; 1303,186 1303,188 ; 1303,186 1303,188 ; 1303,186 1303,188 ; 1303,188 1305,188 ; 1303,188 1303,190 ; 1303,188 1305,188 ; 1303,188 1303,190 ; 1303,188 1305,188 ; 1303,188 1303,190 ; 1304,188 ccw(c1303,188) 1304,188 ; 1304,188 ccw(c1303,188) 1304,188 ; 1304,188 ccw(c1303,188) 1304,188 ; 1304,238 1306,238 ; 1304,238 1306,238 ; 1304,238 1306,238 ; 1304,238 1306,238 ; 1306,236 1306,238 ; 1306,236 1306,238 ; 1306,236 1306,238 ; 1306,236 1306,238 ; 1306,238 1308,238 ; 1306,238 1306,240 ; 1306,238 1308,238 ; 1306,238 1306,240 ; 1306,238 1308,238 ; 1306,238 1306,240 ; 1306,238 1308,238 ; 1306,238 1306,240 ; 1307,188 1309,188 ; 1307,188 1309,188 ; 1307,188 1309,188 ; 1307,238 ccw(c1306,238) 1307,238 ; 1307,238 ccw(c1306,238) 1307,238 ; 1307,238 ccw(c1306,238) 1307,238 ; 1307,238 ccw(c1306,238) 1307,238 ; 1309,186 1309,188 ; 1309,186 1309,188 ; 1309,186 1309,188 ; 1309,188 1311,188 ; 1309,188 1309,190 ; 1309,188 1311,188 ; 1309,188 1309,190 ; 1309,188 1311,188 ; 1309,188 1309,190 ; 1310,188 ccw(c1309,188) 1310,188 ; 1310,188 ccw(c1309,188) 1310,188 ; 1310,188 ccw(c1309,188) 1310,188 ; 1310,238 1312,238 ; 1310,238 1312,238 ; 1310,238 1312,238 ; 1310,238 1312,238 ; 1312,236 1312,238 ; 1312,236 1312,238 ; 1312,236 1312,238 ; 1312,236 1312,238 ; 1312,238 1314,238 ; 1312,238 1312,240 ; 1312,238 1314,238 ; 1312,238 1312,240 ; 1312,238 1314,238 ; 1312,238 1312,240 ; 1312,238 1314,238 ; 1312,238 1312,240 ; 1313,188 1315,188 ; 1313,188 1315,188 ; 1313,188 1315,188 ; 1313,238 ccw(c1312,238) 1313,238 ; 1313,238 ccw(c1312,238) 1313,238 ; 1313,238 ccw(c1312,238) 1313,238 ; 1313,238 ccw(c1312,238) 1313,238 ; 1315,186 1315,188 ; 1315,186 1315,188 ; 1315,186 1315,188 ; 1315,188 1317,188 ; 1315,188 1315,190 ; 1315,188 1317,188 ; 1315,188 1315,190 ; 1315,188 1317,188 ; 1315,188 1315,190 ; 1316,188 ccw(c1315,188) 1316,188 ; 1316,188 ccw(c1315,188) 1316,188 ; 1316,188 ccw(c1315,188) 1316,188 ; 1319,188 1321,188 ; 1319,188 1321,188 ; 1319,188 1321,188 ; 1321,186 1321,188 ; 1321,186 1321,188 ; 1321,186 1321,188 ; 1321,188 1323,188 ; 1321,188 1321,190 ; 1321,188 1323,188 ; 1321,188 1321,190 ; 1321,188 1323,188 ; 1321,188 1321,190 ; 1322,188 ccw(c1321,188) 1322,188 ; 1322,188 ccw(c1321,188) 1322,188 ; 1322,188 ccw(c1321,188) 1322,188 ; 1322,238 1324,238 ; 1322,238 1324,238 ; 1322,238 1324,238 ; 1322,238 1324,238 ; 1324,236 1324,238 ; 1324,236 1324,238 ; 1324,236 1324,238 ; 1324,236 1324,238 ; 1324,238 1326,238 ; 1324,238 1324,240 ; 1324,238 1326,238 ; 1324,238 1324,240 ; 1324,238 1326,238 ; 1324,238 1324,240 ; 1324,238 1326,238 ; 1324,238 1324,240 ; 1325,188 1327,188 ; 1325,188 1327,188 ; 1325,188 1327,188 ; 1325,238 ccw(c1324,238) 1325,238 ; 1325,238 ccw(c1324,238) 1325,238 ; 1325,238 ccw(c1324,238) 1325,238 ; 1325,238 ccw(c1324,238) 1325,238 ; 1327,186 1327,188 ; 1327,186 1327,188 ; 1327,186 1327,188 ; 1327,188 1329,188 ; 1327,188 1327,190 ; 1327,188 1329,188 ; 1327,188 1327,190 ; 1327,188 1329,188 ; 1327,188 1327,190 ; 1328,188 ccw(c1327,188) 1328,188 ; 1328,188 ccw(c1327,188) 1328,188 ; 1328,188 ccw(c1327,188) 1328,188 ; 1331,188 1333,188 ; 1331,188 1333,188 ; 1331,188 1333,188 ; 1333,186 1333,188 ; 1333,186 1333,188 ; 1333,186 1333,188 ; 1333,188 1335,188 ; 1333,188 1333,190 ; 1333,188 1335,188 ; 1333,188 1333,190 ; 1333,188 1335,188 ; 1333,188 1333,190 ; 1334,188 ccw(c1333,188) 1334,188 ; 1334,188 ccw(c1333,188) 1334,188 ; 1334,188 ccw(c1333,188) 1334,188 ; 1337,188 1339,188 ; 1337,188 1339,188 ; 1337,188 1339,188 ; 1339,186 1339,188 ; 1339,186 1339,188 ; 1339,186 1339,188 ; 1339,188 1341,188 ; 1339,188 1339,190 ; 1339,188 1341,188 ; 1339,188 1339,190 ; 1339,188 1341,188 ; 1339,188 1339,190 ; 1340,188 ccw(c1339,188) 1340,188 ; 1340,188 ccw(c1339,188) 1340,188 ; 1340,188 ccw(c1339,188) 1340,188 ; 1340,238 1342,238 ; 1340,238 1342,238 ; 1340,238 1342,238 ; 1340,238 1342,238 ; 1342,236 1342,238 ; 1342,236 1342,238 ; 1342,236 1342,238 ; 1342,236 1342,238 ; 1342,238 1344,238 ; 1342,238 1342,240 ; 1342,238 1344,238 ; 1342,238 1342,240 ; 1342,238 1344,238 ; 1342,238 1342,240 ; 1342,238 1344,238 ; 1342,238 1342,240 ; 1343,188 1345,188 ; 1343,188 1345,188 ; 1343,188 1345,188 ; 1343,238 ccw(c1342,238) 1343,238 ; 1343,238 ccw(c1342,238) 1343,238 ; 1343,238 ccw(c1342,238) 1343,238 ; 1343,238 ccw(c1342,238) 1343,238 ; 1345,186 1345,188 ; 1345,186 1345,188 ; 1345,186 1345,188 ; 1345,188 1347,188 ; 1345,188 1345,190 ; 1345,188 1347,188 ; 1345,188 1345,190 ; 1345,188 1347,188 ; 1345,188 1345,190 ; 1346,188 ccw(c1345,188) 1346,188 ; 1346,188 ccw(c1345,188) 1346,188 ; 1346,188 ccw(c1345,188) 1346,188 ; 1352,238 1354,238 ; 1352,238 1354,238 ; 1352,238 1354,238 ; 1352,238 1354,238 ; 1354,236 1354,238 ; 1354,236 1354,238 ; 1354,236 1354,238 ; 1354,236 1354,238 ; 1354,238 1356,238 ; 1354,238 1354,240 ; 1354,238 1356,238 ; 1354,238 1354,240 ; 1354,238 1356,238 ; 1354,238 1354,240 ; 1354,238 1356,238 ; 1354,238 1354,240 ; 1355,238 ccw(c1354,238) 1355,238 ; 1355,238 ccw(c1354,238) 1355,238 ; 1355,238 ccw(c1354,238) 1355,238 ; 1355,238 ccw(c1354,238) 1355,238 ; 1358,238 1360,238 ; 1358,238 1360,238 ; 1358,238 1360,238 ; 1358,238 1360,238 ; 1360,236 1360,238 ; 1360,236 1360,238 ; 1360,236 1360,238 ; 1360,236 1360,238 ; 1360,238 1362,238 ; 1360,238 1360,240 ; 1360,238 1362,238 ; 1360,238 1360,240 ; 1360,238 1362,238 ; 1360,238 1360,240 ; 1360,238 1362,238 ; 1360,238 1360,240 ; 1361,238 ccw(c1360,238) 1361,238 ; 1361,238 ccw(c1360,238) 1361,238 ; 1361,238 ccw(c1360,238) 1361,238 ; 1361,238 ccw(c1360,238) 1361,238 ; 1376,238 1378,238 ; 1376,238 1378,238 ; 1376,238 1378,238 ; 1376,238 1378,238 ; 1378,236 1378,238 ; 1378,236 1378,238 ; 1378,236 1378,238 ; 1378,236 1378,238 ; 1378,238 1380,238 ; 1378,238 1378,240 ; 1378,238 1380,238 ; 1378,238 1378,240 ; 1378,238 1380,238 ; 1378,238 1378,240 ; 1378,238 1380,238 ; 1378,238 1378,240 ; 1379,238 ccw(c1378,238) 1379,238 ; 1379,238 ccw(c1378,238) 1379,238 ; 1379,238 ccw(c1378,238) 1379,238 ; 1379,238 ccw(c1378,238) 1379,238 ; 1388,238 1390,238 ; 1388,238 1390,238 ; 1388,238 1390,238 ; 1388,238 1390,238 ; 1390,236 1390,238 ; 1390,236 1390,238 ; 1390,236 1390,238 ; 1390,236 1390,238 ; 1390,238 1392,238 ; 1390,238 1390,240 ; 1390,238 1392,238 ; 1390,238 1390,240 ; 1390,238 1392,238 ; 1390,238 1390,240 ; 1390,238 1392,238 ; 1390,238 1390,240 ; 1391,238 ccw(c1390,238) 1391,238 ; 1391,238 ccw(c1390,238) 1391,238 ; 1391,238 ccw(c1390,238) 1391,238 ; 1391,238 ccw(c1390,238) 1391,238 ; 1400,238 1402,238 ; 1400,238 1402,238 ; 1400,238 1402,238 ; 1400,238 1402,238 ; 1402,236 1402,238 ; 1402,236 1402,238 ; 1402,236 1402,238 ; 1402,236 1402,238 ; 1402,238 1404,238 ; 1402,238 1402,240 ; 1402,238 1404,238 ; 1402,238 1402,240 ; 1402,238 1404,238 ; 1402,238 1402,240 ; 1402,238 1404,238 ; 1402,238 1402,240 ; 1403,238 ccw(c1402,238) 1403,238 ; 1403,238 ccw(c1402,238) 1403,238 ; 1403,238 ccw(c1402,238) 1403,238 ; 1403,238 ccw(c1402,238) 1403,238 ; 1457,385 1459,385 ; 1457,385 1459,385 ; 1457,385 1459,385 ; 1459,383 1459,385 ; 1459,383 1459,385 ; 1459,383 1459,385 ; 1459,385 1461,385 ; 1459,385 1459,387 ; 1459,385 1461,385 ; 1459,385 1459,387 ; 1459,385 1461,385 ; 1459,385 1459,387 ; 1460,385 ccw(c1459,385) 1460,385 ; 1460,385 ccw(c1459,385) 1460,385 ; 1460,385 ccw(c1459,385) 1460,385 ; 1465,385 1463,385 1465,385 ; 1465,385 1467,385 1465,385 ; 1465,385 1465,383 1465,385 ; 1465,385 1465,387 1465,385 ; 1466,385 ccw(c1465,385) 1466,385 ; 1466,385 ccw(c1465,385) 1466,385 ; 85.948,88.265 ccw(c81.788,88.265) 85.948,88.265 ; 204.136,78.613 ccw(c199.136,78.613) 204.136,78.613 ; 244.522,89.789 ccw(c239.522,89.789) 244.522,89.789 ; 245.665,58.801 ccw(c240.665,58.801) 245.665,58.801 ; 274.24,116.332 ccw(c269.24,116.332) 274.24,116.332 ; 283.575,230.124 ccw(c282.575,230.124) 283.575,230.124 ; 291.385,63.754 ccw(c286.385,63.754) 291.385,63.754 ; 299.958,192.659 ccw(c298.958,192.659) 299.958,192.659 ; 327.771,178.689 ccw(c326.771,178.689) 327.771,178.689 ; 339.328,228.092 ccw(c338.328,228.092) 339.328,228.092 ; 342.884,199.009 ccw(c341.884,199.009) 342.884,199.009 ; 382.254,185.547 ccw(c381.254,185.547) 382.254,185.547 ; 398.256,162.052 ccw(c397.256,162.052) 398.256,162.052 ; 425.688,194.183 ccw(c424.688,194.183) 425.688,194.183 ; 575.675,327.914 ccw(c574.675,327.914) 575.675,327.914 ; 576.183,343.662 ccw(c575.183,343.662) 576.183,343.662 ; 592.312,327.533 ccw(c591.312,327.533) 592.312,327.533 ; 592.82,343.281 ccw(c591.82,343.281) 592.82,343.281 ; 597.519,312.42 ccw(c596.519,312.42) 597.519,312.42 ; 609.076,314.071 ccw(c608.076,314.071) 609.076,314.071 ; 617.458,329.946 ccw(c616.458,329.946) 617.458,329.946 ; 617.966,361.95 ccw(c616.966,361.95) 617.966,361.95 ; 622.665,314.833 ccw(c621.665,314.833) 622.665,314.833 ; 634.984,345.694 ccw(c633.984,345.694) 634.984,345.694 ; 644.636,475.361 ccw(c643.636,475.361) 644.636,475.361 ; 646.795,491.998 ccw(c645.795,491.998) 646.795,491.998 ; 656.066,329.565 ccw(c655.066,329.565) 656.066,329.565 ; 656.574,361.569 ccw(c655.574,361.569) 656.574,361.569 ; 661.273,314.452 ccw(c660.273,314.452) 661.273,314.452 ; 661.781,491.109 ccw(c660.781,491.109) 661.781,491.109 ; 668.893,405.13 ccw(c667.893,405.13) 668.893,405.13 ; 672.449,345.313 ccw(c671.449,345.313) 672.449,345.313 ; 682.609,472.948 ccw(c681.609,472.948) 682.609,472.948 ; 687.435,402.717 ccw(c686.435,402.717) 687.435,402.717 ; 697.341,404.495 ccw(c696.341,404.495) 697.341,404.495 ; 697.976,360.426 ccw(c696.976,360.426) 697.976,360.426 ; 699.5,421.132 ccw(c698.5,421.132) 699.5,421.132 ; 701.532,243.586 ccw(c700.532,243.586) 701.532,243.586 ; 702.04,275.59 ccw(c701.04,275.59) 702.04,275.59 ; 702.675,313.309 ccw(c701.675,313.309) 702.675,313.309 ; 706.739,228.473 ccw(c705.739,228.473) 706.739,228.473 ; 710.168,403.86 ccw(c709.168,403.86) 710.168,403.86 ; 732.393,256.413 ccw(c731.393,256.413) 732.393,256.413 ; 737.092,225.552 ccw(c736.092,225.552) 737.092,225.552 ; 754,146 ccw(c753,146) 754,146 ; 754,184 ccw(c753,184) 754,184 ; 760,184 ccw(c759,184) 760,184 ; 766,146 ccw(c765,146) 766,146 ; 766,184 ccw(c765,184) 766,184 ; 772,184 ccw(c771,184) 772,184 ; 778,184 ccw(c777,184) 778,184 ; 784,146 ccw(c783,146) 784,146 ; 784,184 ccw(c783,184) 784,184 ; 790,146 ccw(c789,146) 790,146 ; 790,184 ccw(c789,184) 790,184 ; 796,184 ccw(c795,184) 796,184 ; 801.354,403.733 ccw(c800.354,403.733) 801.354,403.733 ; 802,146 ccw(c801,146) 802,146 ; 802,184 ccw(c801,184) 802,184 ; 821,106 ccw(c820,106) 821,106 ; 822,122 ccw(c821,122) 822,122 ; 822,138 ccw(c821,138) 822,138 ; 827,106 ccw(c826,106) 827,106 ; 828,122 ccw(c827,122) 828,122 ; 828,138 ccw(c827,138) 828,138 ; 840,122 ccw(c839,122) 840,122 ; 840,138 ccw(c839,138) 840,138 ; 842.629,394.462 ccw(c841.629,394.462) 842.629,394.462 ; 845,106 ccw(c844,106) 845,106 ; 846.058,433.832 ccw(c845.058,433.832) 846.058,433.832 ; 852,122 ccw(c851,122) 852,122 ; 852,138 ccw(c851,138) 852,138 ; 863,106 ccw(c862,106) 863,106 ; 869,106 ccw(c868,106) 869,106 ; 870,122 ccw(c869,122) 870,122 ; 870,138 ccw(c869,138) 870,138 ; 879.586,235.204 ccw(c878.586,235.204) 879.586,235.204 ; 881,106 ccw(c880,106) 881,106 ; 881.491,234.315 ccw(c880.491,234.315) 881.491,234.315 ; 881.745,251.841 ccw(c880.745,251.841) 881.745,251.841 ; 882.38,401.955 ccw(c881.38,401.955) 882.38,401.955 ; 883.65,250.952 ccw(c882.65,250.952) 883.65,250.952 ; 883.65,431.673 ccw(c882.65,431.673) 883.65,431.673 ; 888,122 ccw(c887,122) 888,122 ; 888,138 ccw(c887,138) 888,138 ; 893,106 ccw(c892,106) 893,106 ; 900,122 ccw(c899,122) 900,122 ; 900,138 ccw(c899,138) 900,138 ; 902.7,234.315 ccw(c901.7,234.315) 902.7,234.315 ; 904.859,250.952 ccw(c903.859,250.952) 904.859,250.952 ; 906,122 ccw(c905,122) 906,122 ; 906,138 ccw(c905,138) 906,138 ; 910.066,394.462 ccw(c909.066,394.462) 910.066,394.462 ; 911,106 ccw(c910,106) 911,106 ; 911.336,417.195 ccw(c910.336,417.195) 911.336,417.195 ; 917,106 ccw(c916,106) 917,106 ; 918,122 ccw(c917,122) 918,122 ; 918,138 ccw(c917,138) 918,138 ; 920.48,233.807 ccw(c919.48,233.807) 920.48,233.807 ; 922.639,250.444 ccw(c921.639,250.444) 922.639,250.444 ; 934.958,233.807 ccw(c933.958,233.807) 934.958,233.807 ; 936,122 ccw(c935,122) 936,122 ; 936,138 ccw(c935,138) 936,138 ; 937.117,250.444 ccw(c936.117,250.444) 937.117,250.444 ; 942,122 ccw(c941,122) 942,122 ; 942,138 ccw(c941,138) 942,138 ; 950,203 ccw(c949,203) 950,203 ; 956,203 ccw(c955,203) 956,203 ; 960,122 ccw(c959,122) 960,122 ; 960,138 ccw(c959,138) 960,138 ; 962,188 ccw(c961,188) 962,188 ; 962,203 ccw(c961,203) 962,203 ; 966,122 ccw(c965,122) 966,122 ; 966,138 ccw(c965,138) 966,138 ; 968,188 ccw(c967,188) 968,188 ; 968,203 ccw(c967,203) 968,203 ; 969.121,233.299 ccw(c968.121,233.299) 969.121,233.299 ; 971.28,249.936 ccw(c970.28,249.936) 971.28,249.936 ; 974,188 ccw(c973,188) 974,188 ; 974,203 ccw(c973,203) 974,203 ; 978,122 ccw(c977,122) 978,122 ; 978,138 ccw(c977,138) 978,138 ; 980,188 ccw(c979,188) 980,188 ; 980,203 ccw(c979,203) 980,203 ; 984,122 ccw(c983,122) 984,122 ; 984,138 ccw(c983,138) 984,138 ; 986,203 ccw(c985,203) 986,203 ; 990,122 ccw(c989,122) 990,122 ; 990,138 ccw(c989,138) 990,138 ; 998,203 ccw(c997,203) 998,203 ; 1002,122 ccw(c1001,122) 1002,122 ; 1002,138 ccw(c1001,138) 1002,138 ; 1004,203 ccw(c1003,203) 1004,203 ; 1009,351 ccw(c1008,351) 1009,351 ; 1010,203 ccw(c1009,203) 1010,203 ; 1015,351 ccw(c1014,351) 1015,351 ; 1016,203 ccw(c1015,203) 1016,203 ; 1019,238 ccw(c1018,238) 1019,238 ; 1021,351 ccw(c1020,351) 1021,351 ; 1022,203 ccw(c1021,203) 1022,203 ; 1027,351 ccw(c1026,351) 1027,351 ; 1028,203 ccw(c1027,203) 1028,203 ; 1031,238 ccw(c1030,238) 1031,238 ; 1033,351 ccw(c1032,351) 1033,351 ; 1039,351 ccw(c1038,351) 1039,351 ; 1040,203 ccw(c1039,203) 1040,203 ; 1043,238 ccw(c1042,238) 1043,238 ; 1045,351 ccw(c1044,351) 1045,351 ; 1046,203 ccw(c1045,203) 1046,203 ; 1049,238 ccw(c1048,238) 1049,238 ; 1050,300 ccw(c1049,300) 1050,300 ; 1051,351 ccw(c1050,351) 1051,351 ; 1052,203 ccw(c1051,203) 1052,203 ; 1055,238 ccw(c1054,238) 1055,238 ; 1056,300 ccw(c1055,300) 1056,300 ; 1057,351 ccw(c1056,351) 1057,351 ; 1058,203 ccw(c1057,203) 1058,203 ; 1062,300 ccw(c1061,300) 1062,300 ; 1063,351 ccw(c1062,351) 1063,351 ; 1067,238 ccw(c1066,238) 1067,238 ; 1068,300 ccw(c1067,300) 1068,300 ; 1069,351 ccw(c1068,351) 1069,351 ; 1070,203 ccw(c1069,203) 1070,203 ; 1074,300 ccw(c1073,300) 1074,300 ; 1075,351 ccw(c1074,351) 1075,351 ; 1076,203 ccw(c1075,203) 1076,203 ; 1080,300 ccw(c1079,300) 1080,300 ; 1081,351 ccw(c1080,351) 1081,351 ; 1086,300 ccw(c1085,300) 1086,300 ; 1087,351 ccw(c1086,351) 1087,351 ; 1087,537 ccw(c1086,537) 1087,537 ; 1088,203 ccw(c1087,203) 1088,203 ; 1088,519 ccw(c1087,519) 1088,519 ; 1091,238 ccw(c1090,238) 1091,238 ; 1092,300 ccw(c1091,300) 1092,300 ; 1093,351 ccw(c1092,351) 1093,351 ; 1094,203 ccw(c1093,203) 1094,203 ; 1097,238 ccw(c1096,238) 1097,238 ; 1098,300 ccw(c1097,300) 1098,300 ; 1098,537 ccw(c1097,537) 1098,537 ; 1099,351 ccw(c1098,351) 1099,351 ; 1099,519 ccw(c1098,519) 1099,519 ; 1100,203 ccw(c1099,203) 1100,203 ; 1103,238 ccw(c1102,238) 1103,238 ; 1104,300 ccw(c1103,300) 1104,300 ; 1105,351 ccw(c1104,351) 1105,351 ; 1106,203 ccw(c1105,203) 1106,203 ; 1110,300 ccw(c1109,300) 1110,300 ; 1111,351 ccw(c1110,351) 1111,351 ; 1116,300 ccw(c1115,300) 1116,300 ; 1117,351 ccw(c1116,351) 1117,351 ; 1122,300 ccw(c1121,300) 1122,300 ; 1122,550 ccw(c1121,550) 1122,550 ; 1123,351 ccw(c1122,351) 1123,351 ; 1123,456 ccw(c1122,456) 1123,456 ; 1124,203 ccw(c1123,203) 1124,203 ; 1127,238 ccw(c1126,238) 1127,238 ; 1128,300 ccw(c1127,300) 1128,300 ; 1129,351 ccw(c1128,351) 1129,351 ; 1129,456 ccw(c1128,456) 1129,456 ; 1130,203 ccw(c1129,203) 1130,203 ; 1133,238 ccw(c1132,238) 1133,238 ; 1134,300 ccw(c1133,300) 1134,300 ; 1135,351 ccw(c1134,351) 1135,351 ; 1135,456 ccw(c1134,456) 1135,456 ; 1136,203 ccw(c1135,203) 1136,203 ; 1136,539 ccw(c1135,539) 1136,539 ; 1136,550 ccw(c1135,550) 1136,550 ; 1140,300 ccw(c1139,300) 1140,300 ; 1141,351 ccw(c1140,351) 1141,351 ; 1141,456 ccw(c1140,456) 1141,456 ; 1146,300 ccw(c1145,300) 1146,300 ; 1147,351 ccw(c1146,351) 1147,351 ; 1147,456 ccw(c1146,456) 1147,456 ; 1148,203 ccw(c1147,203) 1148,203 ; 1151,238 ccw(c1150,238) 1151,238 ; 1152,300 ccw(c1151,300) 1152,300 ; 1153,351 ccw(c1152,351) 1153,351 ; 1153,456 ccw(c1152,456) 1153,456 ; 1154,203 ccw(c1153,203) 1154,203 ; 1158,300 ccw(c1157,300) 1158,300 ; 1159,351 ccw(c1158,351) 1159,351 ; 1159,456 ccw(c1158,456) 1159,456 ; 1160,203 ccw(c1159,203) 1160,203 ; 1163,238 ccw(c1162,238) 1163,238 ; 1164,300 ccw(c1163,300) 1164,300 ; 1165,351 ccw(c1164,351) 1165,351 ; 1165,456 ccw(c1164,456) 1165,456 ; 1168,560 ccw(c1167,560) 1168,560 ; 1170,300 ccw(c1169,300) 1170,300 ; 1171,351 ccw(c1170,351) 1171,351 ; 1171,456 ccw(c1170,456) 1171,456 ; 1172,203 ccw(c1171,203) 1172,203 ; 1173,559 1173,561 1175,561 1175,559 1173,559 ; 1175,238 ccw(c1174,238) 1175,238 ; 1176,300 ccw(c1175,300) 1176,300 ; 1177,351 ccw(c1176,351) 1177,351 ; 1177,456 ccw(c1176,456) 1177,456 ; 1178,203 ccw(c1177,203) 1178,203 ; 1182,300 ccw(c1181,300) 1182,300 ; 1182,560 ccw(c1181,560) 1182,560 ; 1183,351 ccw(c1182,351) 1183,351 ; 1183,456 ccw(c1182,456) 1183,456 ; 1184,203 ccw(c1183,203) 1184,203 ; 1187,238 ccw(c1186,238) 1187,238 ; 1188,300 ccw(c1187,300) 1188,300 ; 1189,351 ccw(c1188,351) 1189,351 ; 1190,203 ccw(c1189,203) 1190,203 ; 1193,238 ccw(c1192,238) 1193,238 ; 1194,300 ccw(c1193,300) 1194,300 ; 1194,547 1194,549 1196,549 1196,547 1194,547 ; 1195,351 ccw(c1194,351) 1195,351 ; 1195,456 ccw(c1194,456) 1195,456 ; 1196,203 ccw(c1195,203) 1196,203 ; 1196,554 ccw(c1195,554) 1196,554 ; 1196,561 ccw(c1195,561) 1196,561 ; 1200,300 ccw(c1199,300) 1200,300 ; 1201,351 ccw(c1200,351) 1201,351 ; 1201,456 ccw(c1200,456) 1201,456 ; 1201,547 1201,549 1203,549 1203,547 1201,547 ; 1201,553 1201,555 1203,555 1203,553 1201,553 ; 1205,238 ccw(c1204,238) 1205,238 ; 1206,300 ccw(c1205,300) 1206,300 ; 1207,351 ccw(c1206,351) 1207,351 ; 1207,456 ccw(c1206,456) 1207,456 ; 1208,203 ccw(c1207,203) 1208,203 ; 1208,560 1210,560 1210,562 1208,562 1208,560 ; 1210,548 ccw(c1209,548) 1210,548 ; 1210,554 ccw(c1209,554) 1210,554 ; 1212,300 ccw(c1211,300) 1212,300 ; 1213,351 ccw(c1212,351) 1213,351 ; 1213,456 ccw(c1212,456) 1213,456 ; 1214,203 ccw(c1213,203) 1214,203 ; 1215,576 ccw(c1214,576) 1215,576 ; 1218,300 ccw(c1217,300) 1218,300 ; 1219,351 ccw(c1218,351) 1219,351 ; 1219,456 ccw(c1218,456) 1219,456 ; 1220,203 ccw(c1219,203) 1220,203 ; 1222,576 ccw(c1221,576) 1222,576 ; 1223,238 ccw(c1222,238) 1223,238 ; 1224,300 ccw(c1223,300) 1224,300 ; 1225,351 ccw(c1224,351) 1225,351 ; 1225,456 ccw(c1224,456) 1225,456 ; 1226,203 ccw(c1225,203) 1226,203 ; 1227,575 1227,577 1229,577 1229,575 1227,575 ; 1229,238 ccw(c1228,238) 1229,238 ; 1230,300 ccw(c1229,300) 1230,300 ; 1231,351 ccw(c1230,351) 1231,351 ; 1231,456 ccw(c1230,456) 1231,456 ; 1232,203 ccw(c1231,203) 1232,203 ; 1236,300 ccw(c1235,300) 1236,300 ; 1237,351 ccw(c1236,351) 1237,351 ; 1237,456 ccw(c1236,456) 1237,456 ; 1238.5,563.5 1238.5,568.5 1243.5,568.5 1243.5,563.5 1238.5,563.5 ; 1241,238 ccw(c1240,238) 1241,238 ; 1242,300 ccw(c1241,300) 1242,300 ; 1243,351 ccw(c1242,351) 1243,351 ; 1243,456 ccw(c1242,456) 1243,456 ; 1244,203 ccw(c1243,203) 1244,203 ; 1247,238 ccw(c1246,238) 1247,238 ; 1248,300 ccw(c1247,300) 1248,300 ; 1249,351 ccw(c1248,351) 1249,351 ; 1254,300 ccw(c1253,300) 1254,300 ; 1255,351 ccw(c1254,351) 1255,351 ; 1255,456 ccw(c1254,456) 1255,456 ; 1256,203 ccw(c1255,203) 1256,203 ; 1260,300 ccw(c1259,300) 1260,300 ; 1261,351 ccw(c1260,351) 1261,351 ; 1261,456 ccw(c1260,456) 1261,456 ; 1262,203 ccw(c1261,203) 1262,203 ; 1265,238 ccw(c1264,238) 1265,238 ; 1266,300 ccw(c1265,300) 1266,300 ; 1267,351 ccw(c1266,351) 1267,351 ; 1267,456 ccw(c1266,456) 1267,456 ; 1272,300 ccw(c1271,300) 1272,300 ; 1273,351 ccw(c1272,351) 1273,351 ; 1273,456 ccw(c1272,456) 1273,456 ; 1274,203 ccw(c1273,203) 1274,203 ; 1277,238 ccw(c1276,238) 1277,238 ; 1278,300 ccw(c1277,300) 1278,300 ; 1279,351 ccw(c1278,351) 1279,351 ; 1284,300 ccw(c1283,300) 1284,300 ; 1285,351 ccw(c1284,351) 1285,351 ; 1285,456 ccw(c1284,456) 1285,456 ; 1286,203 ccw(c1285,203) 1286,203 ; 1289,238 ccw(c1288,238) 1289,238 ; 1290,300 ccw(c1289,300) 1290,300 ; 1291,351 ccw(c1290,351) 1291,351 ; 1291,456 ccw(c1290,456) 1291,456 ; 1292,203 ccw(c1291,203) 1292,203 ; 1295,238 ccw(c1294,238) 1295,238 ; 1296,300 ccw(c1295,300) 1296,300 ; 1297,351 ccw(c1296,351) 1297,351 ; 1297,456 ccw(c1296,456) 1297,456 ; 1298,203 ccw(c1297,203) 1298,203 ; 1302,300 ccw(c1301,300) 1302,300 ; 1303,351 ccw(c1302,351) 1303,351 ; 1303,456 ccw(c1302,456) 1303,456 ; 1304,203 ccw(c1303,203) 1304,203 ; 1308,300 ccw(c1307,300) 1308,300 ; 1309,351 ccw(c1308,351) 1309,351 ; 1309,456 ccw(c1308,456) 1309,456